# EAGLE board espurna-h (EAGLE 8.2.1)
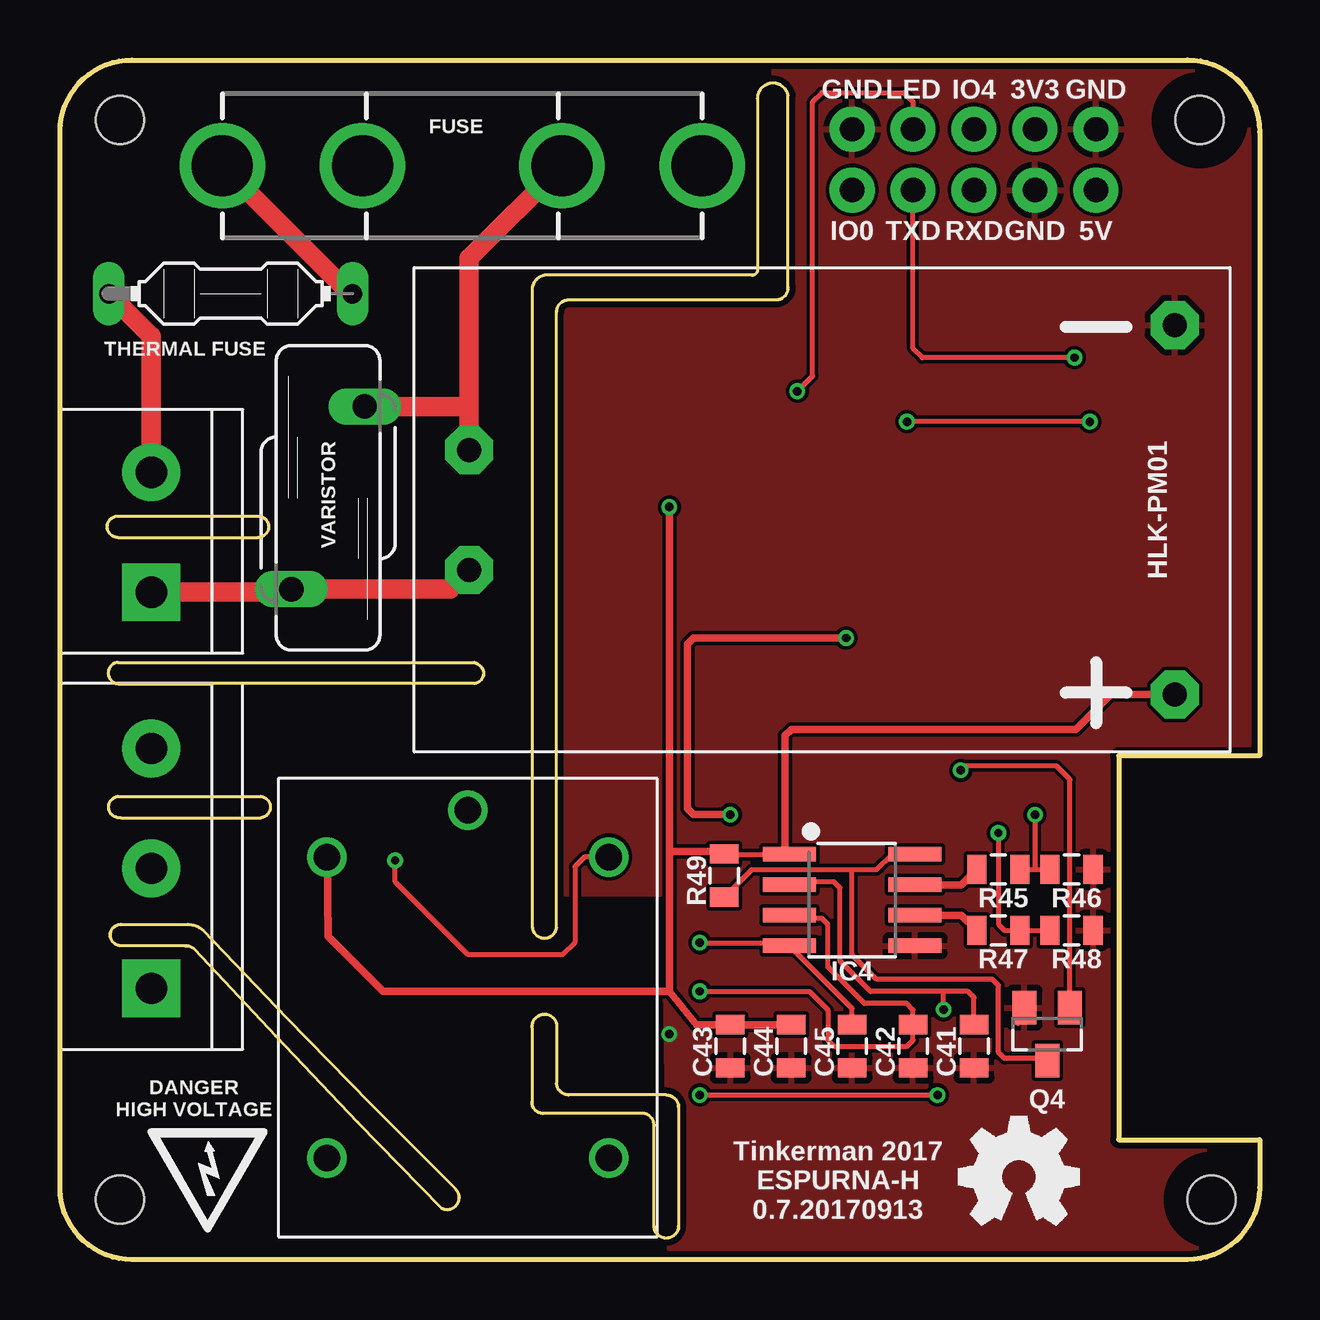
[diagram p0: board, top side]
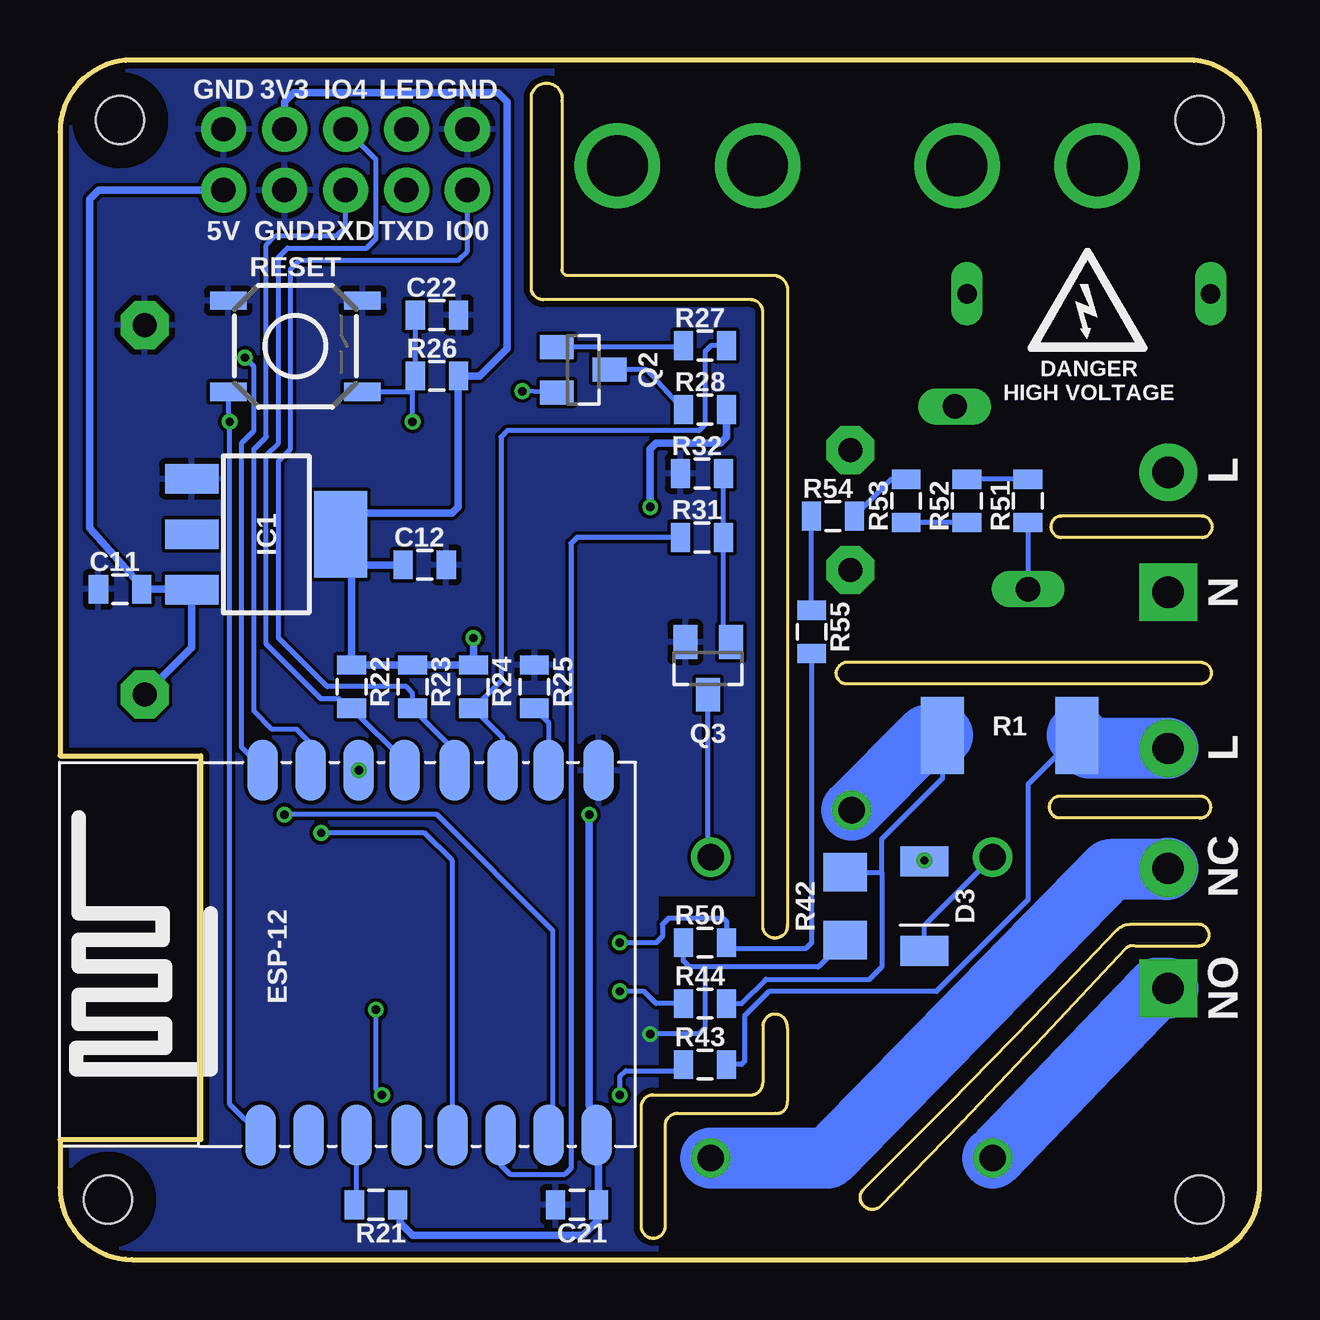
[diagram p1: board, bottom side, seen from below]

Size 50 x 50 mm. Coordinates in mm from the lower left corner, seen from the top.
Outline: 6.34,24 2.5,24 arc-180 2.41,24.89 17.27,24.89 arc-55 17.65,24.51 arc-90 17.27,24 6.35,24
Outline: 0,3 0,47 arc-90 3,50 47,50 arc-90 50,47 50,21 44.13,21 44.13,5 50,5 50,3 arc-90 47,0 3,0 arc-90 0,3
Outline: 5.21,13.08 arc-46 5.59,12.95 arc2 15.88,2.16 arc164 16.51,2.92 arc-2 5.97,13.72 arc44 5.33,13.97 2.54,13.97 arc180 2.54,13.08 5.21,13.08
Outline: 2.54,18.41 8.38,18.41 arc164 8.38,19.3 2.41,19.3 arc180 2.54,18.41
Outline: 19.68,13.97 arc180 20.7,13.84 20.7,39.5 arc-90 21.21,40.01 29.84,40.01 arc90 30.35,40.51 30.35,48.51 arc180 29.08,48.26 29.08,41.27 arc-90 28.83,41.02 20.19,41.02 arc74 19.68,40.51 19.68,13.97
Outline: 19.68,9.65 arc-180 20.7,9.78 20.7,7.37 arc90 21.21,6.86 25.27,6.86 arc-90 25.78,6.35 25.78,1.4 arc-180 24.77,1.4 24.77,5.59 arc90 24.26,6.1 20.19,6.1 arc-106 19.68,6.6 19.68,9.65
Outline: 2.41,30.1 8.26,30.1 arc180 8.26,30.99 2.41,30.99 arc180 2.41,30.1
Copper layers (1*16): Top 0.035mm / dielectric 1.5mm / Bottom 0.035mm
Design rules "seedstudio-2layer": minimum track width 6mil, minimum drill 12mil, track to track 6mil, track to pad 6mil, pad to pad 6mil, via to via 6mil, smd to smd 0mil, copper to edge 10mil, drill to drill 10mil, minimum pad ring 10mil, minimum via ring 6mil, stop-mask expansion 2mil, vias tented up to drill 100mil, thermal gap 10mil

## Footprints (pad centres in the part's own frame; a part is rotated, then mirrored left to right if it is on the bottom)
0805 = smd 0.8 x 1.2: 1 -0.9,0; 2 0.9,0
SOD80 = smd 1.25 x 2: 1 -1.872,0; 2 1.872,0
PICOFUSE = drill 0.813 long: 1 -5.08,0; 2 5.08,0
FUSE_5MM = drill 2.54 pad 3.556: 1 0,-10; 2 0,-4.158; 3 0,4.158; 4 0,10
SOT223 = smd 1.219 x 2.235: 1 -2.311,-3.099; 2 0,-3.099; 3 2.311,-3.099 | smd 3.6 x 2.2: 4 0,3.099
ESP-12-SMD = smd 2.54 x 1.27: ADC -7,5.1; CH_PD -7,3.1; GND 8.2,-7; GPIO0 8.2,-1; GPIO2 8.2,-3; GPIO4 8.2,1.1; GPIO5 8.2,3; GPIO12 -7,-2.9; GPIO13 -7,-4.9; GPIO14 -7,-0.9; GPIO15 8.2,-4.9; GPIO16 -7,1; RESET -7,7.1; RX 8.2,5; TX 8.2,7; VCC -7,-6.9
SOP8 = smd 0.61 x 2.21: 1 0.381,-0.838; 2 1.651,-0.838; 3 2.921,-0.838; 4 4.191,-0.838; 5 4.191,4.394; 6 2.921,4.394; 7 1.651,4.394; 8 0.381,4.394
SCREWTERMINAL-200MIL-2 = drill 1.3 pad 2.413 square: 1 0,0 | drill 1.3 pad 2.413: 2 5,0
SCREWTERMINAL-200MIL-3 = drill 1.3 pad 2.413 square: 1 0,0 | drill 1.3 pad 2.413: 2 5,0; 3 10,0
1X05 = drill 1.016 pad 1.88: 1 0,0; 2 2.54,0; 3 5.08,0; 4 7.62,0; 5 10.16,0
SOT23 = smd 1 x 1.4: 1 -0.95,-1.1; 2 0.95,-1.1; 3 0,1.1
2512 = smd 1.8 x 3.2: 1 -2.8,0; 2 2.8,0
S10K250 = drill 1.016 long: 1 -1.524,-3.81; 2 1.524,3.81
1206 = smd 1.6 x 1.803: 1 -1.422,0; 2 1.422,0
TACTILE-BUTTON-SMD = smd 1.524 x 0.762: 1 -2.794,1.905; 2 2.794,1.905; 3 -2.794,-1.905; 4 2.794,-1.905
SRD-5VDC-SL-C = drill 1.1: CLOSED -6.275,-5.875; COIL1 6.275,5.875; COIL2 6.275,-5.875; COMMON 8.225,0; OPEN -6.275,5.875
HLK-PM01 = drill 1 pad 2 octagon: AC_L -14.7,2.5; AC_N -14.7,-2.5; VO+ 14.7,-7.7; VO- 14.7,7.7
HOLE_M2_WIDE = hole 2: 0,0

## Placement (x,y rotation side)
C11  10uF  [0805]  47.5,27.94 0 bottom
C12  10uF  [0805]  34.8,28.96 0 bottom
C21  100nF  [0805]  28.45,2.29 180 bottom
C22  100nF  [0805]  34.29,39.37 0 bottom
C41  33nF  [0805]  38.1,8.89 90 top
C42  33nF  [0805]  35.56,8.89 90 top
C43  100nF  [0805]  27.94,8.89 90 top
C44  1uF  [0805]  30.48,8.89 90 top
C45  100nF  [0805]  33.02,8.89 90 top
D3  1N4148  [SOD80]  13.97,14.73 270 bottom
F1  73C  [PICOFUSE]  7.11,40.26 0 top
F2  FUSEX20MM  [FUSE_5MM]  16.76,45.59 270 top
IC1  AMS1117-3.3  [SOT223]  41.4,30.23 270 bottom
IC2  ESP-12-SMD  [ESP-12-SMD]  34.54,12.19 90 bottom
IC4  HLW8012  [SOP8]  31.24,17.27 270 top
JP2  [SCREWTERMINAL-200MIL-2]  3.81,27.81 90 top
JP4  [SCREWTERMINAL-200MIL-3]  3.81,11.3 90 top
JP21  [1X05]  33.02,44.58 0 top
JP22  [1X05]  33.02,47.12 0 top
Q2  [SOT23]  28.19,37.08 270 bottom
Q3  [SOT23]  22.99,24.64 180 bottom
Q4  [SOT23]  41.15,9.4 180 top
R1  0.001R  [2512]  10.41,21.84 0 bottom
R11  S10K250  [S10K250]  11.18,31.75 0 top
R21  10K  [0805]  36.83,2.29 180 bottom
R22  10K  [0805]  37.85,23.88 270 bottom
R23  10K  [0805]  35.31,23.88 270 bottom
R24  10K  [0805]  32.77,23.88 270 bottom
R25  10K  [0805]  30.23,23.88 270 bottom
R26  10K  [0805]  34.29,36.83 0 bottom
R27  22  [0805]  23.11,38.1 0 bottom
R28  300  [0805]  23.11,35.43 0 bottom
R31  1K  [0805]  23.24,30.1 0 bottom
R32  10K  [0805]  23.24,32.77 0 bottom
R42  0  [1206]  17.27,14.73 90 bottom
R43  1K  [0805]  23.11,8.13 0 bottom
R44  1K  [0805]  23.11,10.67 0 bottom
R45  10K  [0805]  39.12,16.26 180 top
R46  15K  [0805]  42.16,16.26 180 top
R47  10K  [0805]  39.12,13.72 180 top
R48  15K  [0805]  42.16,13.72 180 top
R49  10K  [0805]  27.69,16 90 top
R50  1K  [0805]  23.11,13.21 0 bottom
R51  470K  [0805]  9.65,31.62 90 bottom
R52  470K  [0805]  12.19,31.62 90 bottom
R53  470K  [0805]  14.73,31.62 90 bottom
R54  470K  [0805]  17.78,30.99 0 bottom
R55  470K  [0805]  18.67,26.16 270 bottom
RESET  TACTILE_BUTTON_SMD  [TACTILE-BUTTON-SMD]  40.19,38.07 0 bottom
RLY1  SRD-05VDC-SL-C  [SRD-5VDC-SL-C]  17,10.5 90 top
U$1  MAINS_CONVERTERS  [HLK-PM01]  31.76,31.25 0 top
U$2  [HOLE_M2_WIDE]  2.5,2.5 0 top
U$3  [HOLE_M2_WIDE]  2.5,47.5 0 top
U$4  [HOLE_M2_WIDE]  47.5,47.5 0 top
U$5  [HOLE_M2_WIDE]  48,2.5 0 top

## Library data of the parts
C11 C12 C21 C22 C41-C45 D3 F2 IC1 IC2 IC4 JP2 JP4 JP21 JP22 Q2-Q4 R1 R11 R21-R28 R31 R32 R42-R55 RESET U$2-U$5 = xose
F1 = fuse
RLY1 = Spark
U$1 = captain-slow

## Nets
3V3: C12.1 C21.1 IC1.4 IC2.VCC JP22.4 R21.1 R22.1 R23.1 R24.1 R26.2
5V: C11.2 C43.2 C44.2 D3.2 IC1.3 IC4.1 JP21.5 R28.2 R49.2 RLY1.COIL1 U$1.VO+
A0: IC2.ADC
CH_PD: IC2.CH_PD R21.2
GND: C11.1 C12.2 C21.2 C22.2 C41.1 C42.1 C43.1 C44.1 C45.1 IC1.1 IC2.GND IC4.5 JP21.4 JP22.1 JP22.5 Q3.2 Q4.2 R25.1 R32.1 R42.1 R46.1 R48.1 R50.1 RESET.1 RESET.2 U$1.VO-
GPIO0: IC2.GPIO0 JP21.1 R23.2
GPIO2: IC2.GPIO2 R24.2 R27.2
GPIO4: IC2.GPIO4 JP22.3 R22.2
GPIO5: IC2.GPIO5 Q4.1
GPIO12: IC2.GPIO12 R31.1
GPIO13: IC2.GPIO13 R45.1 R46.2
GPIO14: IC2.GPIO14 R47.1 R48.2
GPIO15: IC2.GPIO15 R25.2
GPIO16: IC2.GPIO16
LED: JP22.2 Q2.2
LINE_I: F1.1 JP2.2
LINE_L: R1.1 R42.2 R44.2 RLY1.COMMON
LINE_M: JP4.3 R1.2 R43.2
LINE_P: F2.3 R11.2 U$1.AC_L
N$1: Q2.3 R28.1
N$3: Q2.1 R27.1
N$4: D3.1 Q3.3 RLY1.COIL2
N$5: Q3.1 R31.2 R32.2
N$7: F1.2 F2.1
N$10: IC4.8 Q4.3 R49.1
N$11: IC4.7 R45.2
N$12: C41.2 IC4.2 R43.1
N$13: IC4.6 R47.2
N$14: C42.2 IC4.3 R44.1
N$16: R54.1 R55.1
N$17: R53.2 R54.2
N$18: R52.1 R53.1
N$19: R51.2 R52.2
NC: JP4.2 RLY1.CLOSED
NEUTRAL: JP2.1 R11.1 R51.1 U$1.AC_N
NO: JP4.1 RLY1.OPEN
RESET: C22.1 IC2.RESET R26.1 RESET.3 RESET.4
RXD: IC2.RX JP21.3
TXD: IC2.TX JP21.2
V2P: C45.2 IC4.4 R50.2 R55.2

## Tracks (layer width: path | path; a pad name or v marks a point on that pad's centre or on a via)
3V3  (via drill 0.35)
  Top 0.305: v27.94,18.54 26.42,18.54 26.16,18.8 26.16,25.65 26.42,25.91 v32.77,25.91
  Bottom 0.203: 33.53,37.2 R26.2 33.39,37.07
  Bottom 0.305: R21.1 35.81,2.17 35.81,1.52 35.31,1.02 28.19,1.02 27.55,1.66 C21.1 27.55,5.1 IC2.VCC 27.94,6.5 v27.94,18.54 | 38.36,30.77 38.76,31.5 | 38.36,30.77 IC1.4 37.85,29.31 37.85,28.96 | 37.85,28.96 R22.1 R23.1 R24.1 v32.77,25.91 | C12.1 37.85,28.96 | JP22.4 40.64,48.26 40.26,48.64 31.75,48.64 31.37,48.26 31.37,37.97 32.51,36.83 R26.2 33.4,36.82 33.4,31.37 33.66,31.11 37.85,31.11 38.19,30.77 38.36,30.77
5V  (via drill 0.35)
  Top 0.203: 27.57,17.02 R49.2 IC4.1
  Top 0.305: RLY1.COIL1 11.18,13.46 13.46,11.18 25.4,11.18 | 25.4,11.18 25.4,17.02 | 25.4,17.02 27.57,17.02 | C44.2 C43.2 26.53,9.79 25.4,11.18 | v25.4,31.37 25.4,17.02 | IC4.1 30.23,17.07 30.23,21.84 30.48,22.1 42.34,22.1 43.8,23.55 U$1.VO+
  Bottom 0.203: D3.2 13.97,13.93 RLY1.COIL1 | 22.29,35.48 22.23,35.55
  Bottom 0.305: JP21.5 48.39,44.58 48.77,44.2 48.77,30.48 46.6,28.06 C11.2 44.32,27.94 IC1.3 44.5,25.51 U$1.VO+ | R28.2 22.23,35.55 22.23,34.29 22.48,34.04 25.15,34.04 25.4,33.78 v25.4,31.37
CH_PD
  Bottom 0.203: R21.2 37.64,2.37 IC2.CH_PD
GND  (via drill 0.35)
  Top 0.203: 39.94,9.83 Q4.2 | 43.06,13.62 R48.1
  Bottom 0.203: 23.11,12.19 18.39,12.19 R42.1 | 23.11,12.19 23.76,12.19 24.01,12.45 R50.1 | 23.11,12.19 23.11,9.65 23.37,9.4 v25.4,9.4
  pour Bottom: 29.46,50.04 29.72,40.64 20.32,40.64 20.32,15.24 25.15,15.24 25.15,-0.25 50.8,-0.25 50.8,50.29 29.46,50.29
  pour Top: 29.72,50.04 29.97,40.64 20.57,40.64 20.32,15.24 25.15,15.24 25.4,-0.25 51.05,-0.25 51.05,50.29 29.72,50.29
GPIO0
  Bottom 0.203: IC2.GPIO0 33.54,21.21 R23.2 35.31,23.62 35.56,23.88 38.86,23.88 40.89,25.91 40.89,33.27 40.39,33.78 40.39,41.27 40.01,41.66 33.4,41.66 33.02,42.04 JP21.1
GPIO2
  Bottom 0.203: IC2.GPIO2 31.54,21.75 R24.2 31.62,24.12 31.62,34.29 31.37,34.54 23.37,34.54 23.11,34.8 23.11,37.85 22.86,38.1 R27.2
GPIO4
  Bottom 0.203: IC2.GPIO4 35.64,20.77 R22.2 37.96,22.98 38.35,23.37 39.12,23.37 41.4,25.65 41.4,33.53 40.89,34.04 40.89,41.78 40.51,42.16 37.21,42.16 36.83,42.55 36.83,45.85 JP22.3
GPIO5  (via drill 0.35)
  Top 0.203: Q4.1 42.1,20 41.53,20.57 37.73,20.57 IC2.GPIO5
  other vias: 37.54,20.39
GPIO12
  Bottom 0.203: IC2.GPIO12 31.64,3.96 31.24,3.56 28.96,3.56 28.7,3.81 28.7,29.84 28.45,30.1 R31.1
GPIO13  (via drill 0.35)
  Top 0.203: R45.1 40.64,16.26 | 40.64,16.26 R46.2 | v40.64,18.54 40.64,16.26
  Bottom 0.203: v40.64,18.54 34.29,18.54 29.46,13.72 29.46,5.37 IC2.GPIO13
GPIO14  (via drill 0.35)
  Top 0.203: v39.12,17.78 39.12,13.97 39.37,13.72 R47.1 R48.2
  Bottom 0.203: IC2.GPIO14 33.64,16.63 34.8,17.78 v39.12,17.78
GPIO15
  Bottom 0.203: R25.2 29.64,22.39 IC2.GPIO15
LED  (via drill 0.35)
  Top 0.203: v30.73,36.2 31.37,36.83 31.37,48.26 31.75,48.64 35.18,48.64 35.56,48.26 JP22.2
  Bottom 0.203: Q2.2 v30.73,36.2
LINE_I
  Top 0.813: JP2.2 3.81,38.48 F1.1
LINE_L
  Bottom 0.203: 15.75,16.13 15.75,12.19 16.26,11.68 20.57,11.68 21.59,10.67 R44.2 | 15.75,16.13 15.75,17.53 13.21,20.07 R1.1 | RLY1.COMMON 17.27,18.45 | R42.2 17.25,16.13 15.75,16.13
  Bottom 2.54: RLY1.COMMON 13.88,21.84 R1.1
LINE_M
  Bottom 0.203: R1.2 9.65,19.81 9.65,14.99 13.46,11.18 20.45,11.18 21.46,10.16 21.46,8.26 21.59,8.13 R43.2
  Bottom 2.54: JP4.3 7.07,21.3 R1.2
LINE_P
  Top 0.813: F2.3 17.06,41.73 17.06,35.69 | 17.06,35.69 U$1.AC_L | R11.2 16.93,35.56 17.06,35.69
N$1
  Bottom 0.203: R28.1 25.54,37.08 Q2.3
N$3
  Bottom 0.203: R27.1 24.08,38.03 Q2.1
N$4  (via drill 0.35)
  Top 0.203: RLY1.COIL2 21.86,16.77 21.46,16.38 21.46,13.21 20.95,12.7 17.02,12.7 13.97,15.75 v13.97,16.64
  Bottom 0.203: RLY1.COIL2 22.99,16.89 Q3.3 | D3.1 v13.97,16.64
N$5
  Bottom 0.203: R32.2 R31.2 22.34,26.04 Q3.1
N$7
  Top 0.813: F1.2 12.1,40.26 F2.1
N$10
  Top 0.203: R49.1 28.84,16.26 33.02,16.26 | 33.02,16.26 34.04,16.26 34.67,16.89 IC4.8 | Q4.3 41.06,8.38 39.37,8.38 39.12,8.64 39.12,11.43 38.86,11.68 34.04,11.68 33.02,12.7 33.02,16.26
N$11
  Top 0.305: R45.2 37.58,15.62 IC4.7
N$12  (via drill 0.35)
  Top 0.203: C41.2 38.1,10.92 37.85,11.18 36.83,11.18 | IC4.2 30.53,15.75 32.26,15.75 32.51,15.49 32.51,12.45 33.78,11.18 36.83,11.18 | v26.67,6.86 v36.58,6.86 | v36.83,10.41 36.83,11.18
  Bottom 0.203: v26.67,6.86 26.67,7.62 26.42,7.87 24.38,7.87 24.13,8.13 R43.1 | v36.58,6.86 36.83,7.11 v36.83,10.41
N$13
  Top 0.305: IC4.6 37.58,14.35 R47.2
N$14  (via drill 0.35)
  Top 0.203: v26.67,11.18 31.24,11.18 32,10.41 32,9.14 32.26,8.89 35.31,8.89 35.56,9.14 C42.2 35.56,10.41 35.31,10.67 33.53,10.67 32,12.19 32,13.97 31.75,14.22 30.53,14.22 IC4.3 30.86,14.35
  Bottom 0.203: R44.1 25.15,10.67 25.65,11.18 v26.67,11.18
N$16
  Bottom 0.203: R55.1 18.68,27.07 R54.1
N$17
  Bottom 0.203: R54.2 15.35,32.52 R53.2
N$18
  Bottom 0.203: R52.1 R53.1
N$19
  Bottom 0.203: R51.2 R52.2
NC
  Bottom 2.54: RLY1.CLOSED 18,4.22 6.22,16.26 3.88,16.26 3.83,16.3 JP4.2
NEUTRAL
  Top 0.813: JP2.1 9.53,27.81 R11.1 16.25,27.94 U$1.AC_N
  Bottom 0.203: R51.1 R11.1
NO
  Bottom 2.54: RLY1.OPEN 4.47,11.13 4.3,11.3 JP4.1
RESET  (via drill 0.35)
  Top 0.203: v42.93,34.92 v35.31,34.92
  Bottom 0.203: C22.1 R26.1 | R26.1 35.35,36.16 RESET.4 | IC2.RESET 42.93,6.47 v42.93,34.92 42.98,35.36 RESET.3 | v35.31,34.92 35.31,37.22 R26.1
RXD
  Bottom 0.203: IC2.RX 39.54,21.51 40.13,22.1 41.15,22.1 41.91,22.86 41.91,33.78 41.4,34.29 41.4,42.29 41.02,42.67 38.48,42.67 38.1,43.05 JP21.3
TXD  (via drill 0.35)
  Top 0.203: v42.29,37.59 35.94,37.59 35.56,37.97 JP21.2
  Bottom 0.203: IC2.TX 41.54,20.46 42.42,21.34 42.42,34.04 41.91,34.54 41.91,37.21 v42.29,37.59
V2P  (via drill 0.35)
  Top 0.203: C45.2 33.02,10.46 IC4.4 30.28,13.21 v26.67,13.21
  Bottom 0.203: R50.2 22.1,13.32 | R50.2 22.21,14.09 22.35,14.22 24.64,14.22 24.89,13.97 24.89,13.46 25.15,13.21 v26.67,13.21 | R55.2 18.67,13.21 18.92,12.95 21.96,12.95 R50.2

## Text on the board
tPlace: GND | LED | IO4 | 3V3 | GND | IO0 | TXD | RXD | GND | 5V
bPlace: GND | LED | IO4 | 3V3 | GND | IO0 | TXD | RXD | GND | 5V | L | N | L | NC | NO
tNames: FUSE | THERMAL FUSE | VARISTOR | DANGER / HIGH VOLTAGE | Tinkerman 2017 / ESPURNA-H / 0.7.20170913
bNames: DANGER / HIGH VOLTAGE